# EAGLE board PCB 2.0 (EAGLE 6.5.0)

Size 45 x 30 mm. Coordinates in mm from the lower left corner, seen from the top.
Outline: 0,0 45,0 45,30 0,30 0,0
Copper layers (1*16): Top 0.035mm / dielectric 1.5mm / Bottom 0.035mm
Design rules "default": minimum track width 10mil, minimum drill 24mil, track to track 8mil, track to pad 8mil, pad to pad 8mil, via to via 8mil, smd to smd 8mil, copper to edge 40mil, drill to drill 8mil, minimum pad ring 10mil, minimum via ring 8mil, stop-mask expansion 4mil, vias tented up to drill 0mil, thermal gap 10mil
Net classes: 0 default: width 0.152 mm, drill 0.305 mm, clearance 0.152 mm; 1 RF: width 0.152 mm, clearance 0.152 mm

## Footprints (pad centres in the part's own frame; a part is rotated, then mirrored left to right if it is on the bottom)
BALUN-0805 = smd 1 x 0.35: 1 -0.9,0.65; 2 -0.9,0; 3 -0.9,-0.65; 4 0.9,-0.65; 5 0.9,0; 6 0.9,0.65
C1206 = smd 1.6 x 1.8: 1 -1.4,0; 2 1.4,0
C0603 = smd 1.1 x 1: 1 -0.85,0; 2 0.85,0
C0402 = smd 0.7 x 0.9: 1 -0.65,0; 2 0.65,0
CONN_USB_MINI-B = smd 2 x 2.5: BODY@1 -4.45,2.5; BODY@2 4.45,2.5; BODY@3 4.45,-3; BODY@4 -4.45,-3 | smd 0.5 x 3.3: D+ 0,3.1; D- -0.8,3.1; GND 1.6,3.1; ID 0.8,3.1; VUSB -1.6,3.1 | hole 0.9: -2.2,0; 2.2,0
R603 = smd 1 x 1.1: 1 -0.85,0; 2 0.85,0
JP-2MM-2 = drill 0.9 pad 1.27 square: 1 0,-1 | drill 0.9 pad 1.27: 2 0,1
HDR-2X5-2.00 = drill 0.8 square: 1 -4,-1 | drill 0.8 pad 1.422: 2 -4,1; 3 -2,-1; 4 -2,1; 5 0,-1; 6 0,1; 7 2,-1; 8 2,1; 9 4,-1; 10 4,1
LED-805 = smd 1.2 x 1.2: A 0,-1.05; C 0,1.05
QFN56 = smd 1 x 0.24: 1 -4,3.25; 2 -4,2.75; 3 -4,2.25; 4 -4,1.75; 5 -4,1.25; 6 -4,0.75; 7 -4,0.25; 8 -4,-0.25; 9 -4,-0.75; 10 -4,-1.25; 11 -4,-1.75; 12 -4,-2.25; 13 -4,-2.75; 14 -4,-3.25; 29 4,-3.25; 30 4,-2.75; 31 4,-2.25; 32 4,-1.75; 33 4,-1.25; 34 4,-0.75; 35 4,-0.25; 36 4,0.25; 37 4,0.75; 38 4,1.25; 39 4,1.75; 40 4,2.25; 41 4,2.75; 42 4,3.25 | smd 0.24 x 1: 15 -3.25,-4; 16 -2.75,-4; 17 -2.25,-4; 18 -1.75,-4; 19 -1.25,-4; 20 -0.75,-4; 21 -0.25,-4; 22 0.25,-4; 23 0.75,-4; 24 1.25,-4; 25 1.75,-4; 26 2.25,-4; 27 2.75,-4; 28 3.25,-4; 43 3.25,4; 44 2.75,4; 45 2.25,4; 46 1.75,4; 47 1.25,4; 48 0.75,4; 49 0.25,4; 50 -0.25,4; 51 -0.75,4; 52 -1.25,4; 53 -1.75,4; 54 -2.25,4; 55 -2.75,4; 56 -3.25,4 | smd 4.65 x 4.65: PAD 0,0
12LGA_VGG3-D = smd 0.35 x 0.3: 1 -0.775,0.75; 2 -0.775,0.25; 3 -0.775,-0.25; 4 -0.775,-0.75; 7 0.775,-0.75; 8 0.775,-0.25; 9 0.775,0.25; 10 0.775,0.75 | smd 0.3 x 0.35: 5 -0.25,-0.775; 6 0.25,-0.775; 11 0.25,0.775; 12 -0.25,0.775
DN007+0 = smd 0.46 x 1: FEED 2.22,-2.8 | smd 1.01 x 0.74: GND -1.16,-2.93; GND@1 1.035,-2.93
SOT223 = smd 1.5 x 2: 1 -2.3,-3.15; 2 0,-3.15; 3 2.3,-3.15 | smd 3.8 x 2: 4 0,3.15
XTAL-4-3225 = smd 1.4 x 1.2: 1 -1.1,-0.85; 2 1.1,-0.85; 3 1.1,0.85; 4 -1.1,0.85
FC-12M = smd 0.7 x 1.4: 1 -0.85,0; 2 0.85,0

## Placement (x,y rotation side)
B1  BALUN  [BALUN-0805]  34,16 180 top
C1  0u1  [C1206]  19,21 0 top
C2  47p  [C0603]  13.5,14 0 top
C3  0u1  [C1206]  31,27.5 0 top
C4  47p  [C0603]  13.5,11 0 top
C5  1n  [C0603]  34.5,8 0 top
C6  47p  [C0603]  31.5,17 90 top
C7  47p  [C0603]  18,11 0 top
C8  47p  [C0603]  18,18 0 top
C9  47p  [C0603]  31,24 90 top
C10  0.1 uF  [C0402]  2.5,24 0 top
C11  0.1 uF  [C0402]  6.5,28.5 0 top
C81  1u  [C0402]  29.55,7.75 0 top
C82  1u  [C0402]  16,8 0 top
C91  0u1  [C0402]  9.5,21.5 0 top
C92  0u1  [C0402]  9.5,19.5 0 top
C93  0u1  [C0402]  14,4.5 0 top
C94  0u1  [C0402]  35,22 0 top
C95  0u1  [C0402]  35,20 0 top
C96  0u1  [C0402]  35,24 0 top
C97  0u1  [C0402]  35,26 0 top
CN1  USB-OTG  [CONN_USB_MINI-B]  5,6 270 top
FB1  [R603]  20,27.5 0 top
FB2  [R603]  9.5,14 0 top
JP1  JP-2MM-2  [JP-2MM-2]  19,24 270 top
JTAG  JTAG10  [HDR-2X5-2.00]  27.9,3.6 180 top
LED2  [LED-805]  16.5,4 180 top
R1  1k5  [R603]  34.5,13 0 top
R2  33  [R603]  9.5,17 0 top
R3  33  [R603]  13.5,17 0 top
R4  56K  [R603]  20.68,7.95 0 top
R5  2K2  [R603]  34.5,10.5 0 top
R6  470  [R603]  14.5,23.5 0 top
R7  DNM  [R603]  13,7.5 90 top
U1  CC2538  [QFN56]  25.5,14 180 top
U$1  BMA250  [12LGA_VGG3-D]  3,27.5 180 top
U$2  INVERTED_F_ANTENNA+0  [DN007+0]  40,18 270 top
VREG1  LM3940IMP  [SOT223]  25.5,24 0 top
X1  32MHz  [XTAL-4-3225]  18,14.5 90 top
X2  FC-12M  [FC-12M]  31,20.5 90 top

## Library data of the parts
B1 C1-C9 C81 C82 C91-C97 FB1 FB2 LED2 R1-R7 X1 = discrete
C10 C11 = resistor
CN1 = connectors
JP1 = damjan
JTAG = jtag
U1 = ic
U$1 = DSSCircuits
U$2 = antenna
VREG1 = voltage-regulators
X2 = crystal

## Nets
3V3: C3.2 C91.1 C92.1 C93.1 C94.1 C95.1 C96.1 C97.1 FB1.2 JTAG.1 JTAG.2 U1.4 U1.10 U1.15 U1.24 U1.33 U1.36 U1.39 U1.40 U1.41 U1.43 U1.55
!RST: JTAG.4 R5.2
!RST_PIN: C5.2 R5.1 U1.28
CN1: C4.2 CN1.D+ R1.2 R2.1
DCOUPL: C81.2 C82.2 U1.32 U1.56
GND: B1.2 B1.5 B1.6 C1.1 C2.1 C3.1 C4.1 C5.1 C6.1 C7.1 C8.1 C9.1 C10.1 C11.2 C81.1 C82.1 C91.2 C92.2 C93.2 C94.2 C95.2 C96.2 C97.2 FB2.2 JTAG.8 JTAG.10 LED2.C R4.2 R7.2 U1.1 U1.5 U1.6 U1.7 U1.8 U1.9 U1.50 U1.51 U1.52 U1.53 U1.54 U1.PAD U$1.4 U$1.8 U$1.9 U$1.11 U$2.FEED VREG1.2 VREG1.4 X1.2 X1.4
N$1: R2.2 U1.2
N$2: R3.2 U1.3
N$3: CN1.BODY@1 CN1.BODY@2 CN1.BODY@3 CN1.BODY@4 CN1.GND FB2.1
N$4: R1.1 U1.14
N$5: R4.1 U1.42
N$6: JTAG.9 U1.47
N$7: JTAG.7 U1.46
N$8: U1.27 U$1.5
N$9: U1.26 U$1.6
N$10: U1.21 U$1.1
N$11: U1.18 U$1.12
N$12: C2.2 CN1.D- R3.1
N$13: U1.31 U$1.10
N$15: U1.20 U$1.2
N$17: FB1.1 VREG1.3
N$18: JP1.2 U1.13
N$23: C6.2 U1.45 X2.1
N$27: B1.3 U1.38
N$28: B1.4 U1.37
N$30: C8.2 U1.35 X1.3
N$31: C7.2 U1.34 X1.1
N$40: C9.2 U1.44 X2.2
N$44: JP1.1 R6.1
N$45: LED2.A R6.2
N$46: CN1.ID R7.1
PB6: JTAG.5 U1.49
PB7: JTAG.6 U1.48
RF: B1.1 U$2.GND U$2.GND@1
VBUS: C1.2 CN1.VUSB VREG1.1
VDD: C11.1 U$1.7
VDDIO: C10.2 U$1.3

## Tracks (layer width: path | path; a pad name or v marks a point on that pad's centre or on a via)
3V3  (21 unrouted)
!RST  (1 unrouted)
!RST_PIN  (2 unrouted)
CN1  (3 unrouted)
DCOUPL  (3 unrouted)
GND  (49 unrouted)
N$1  (1 unrouted)
N$2  (1 unrouted)
N$3  (5 unrouted)
N$4  (1 unrouted)
N$5  (1 unrouted)
N$6  (1 unrouted)
N$7  (1 unrouted)
N$8  (1 unrouted)
N$9  (1 unrouted)
N$10  (1 unrouted)
N$11  (1 unrouted)
N$12  (2 unrouted)
N$13  (1 unrouted)
N$15  (1 unrouted)
N$17  (1 unrouted)
N$18  (1 unrouted)
N$23  (2 unrouted)
N$27  (1 unrouted)
N$28  (1 unrouted)
N$30  (2 unrouted)
N$31  (2 unrouted)
N$40  (2 unrouted)
N$44  (1 unrouted)
N$45  (1 unrouted)
N$46  (1 unrouted)
PB6  (1 unrouted)
PB7  (1 unrouted)
RF  (2 unrouted)
VBUS  (2 unrouted)
VDD  (1 unrouted)
VDDIO  (1 unrouted)